# Altium PCB carte_ecureuil2026.PcbDoc
Units mm, origin at the board's own origin, x right, y up, seen from the top; angles counter-clockwise.
Board outline 83 x 54 mm, 2 copper layers (Top Layer, Bottom Layer); 41 components, 34 nets, 131 pads, 0 vias.
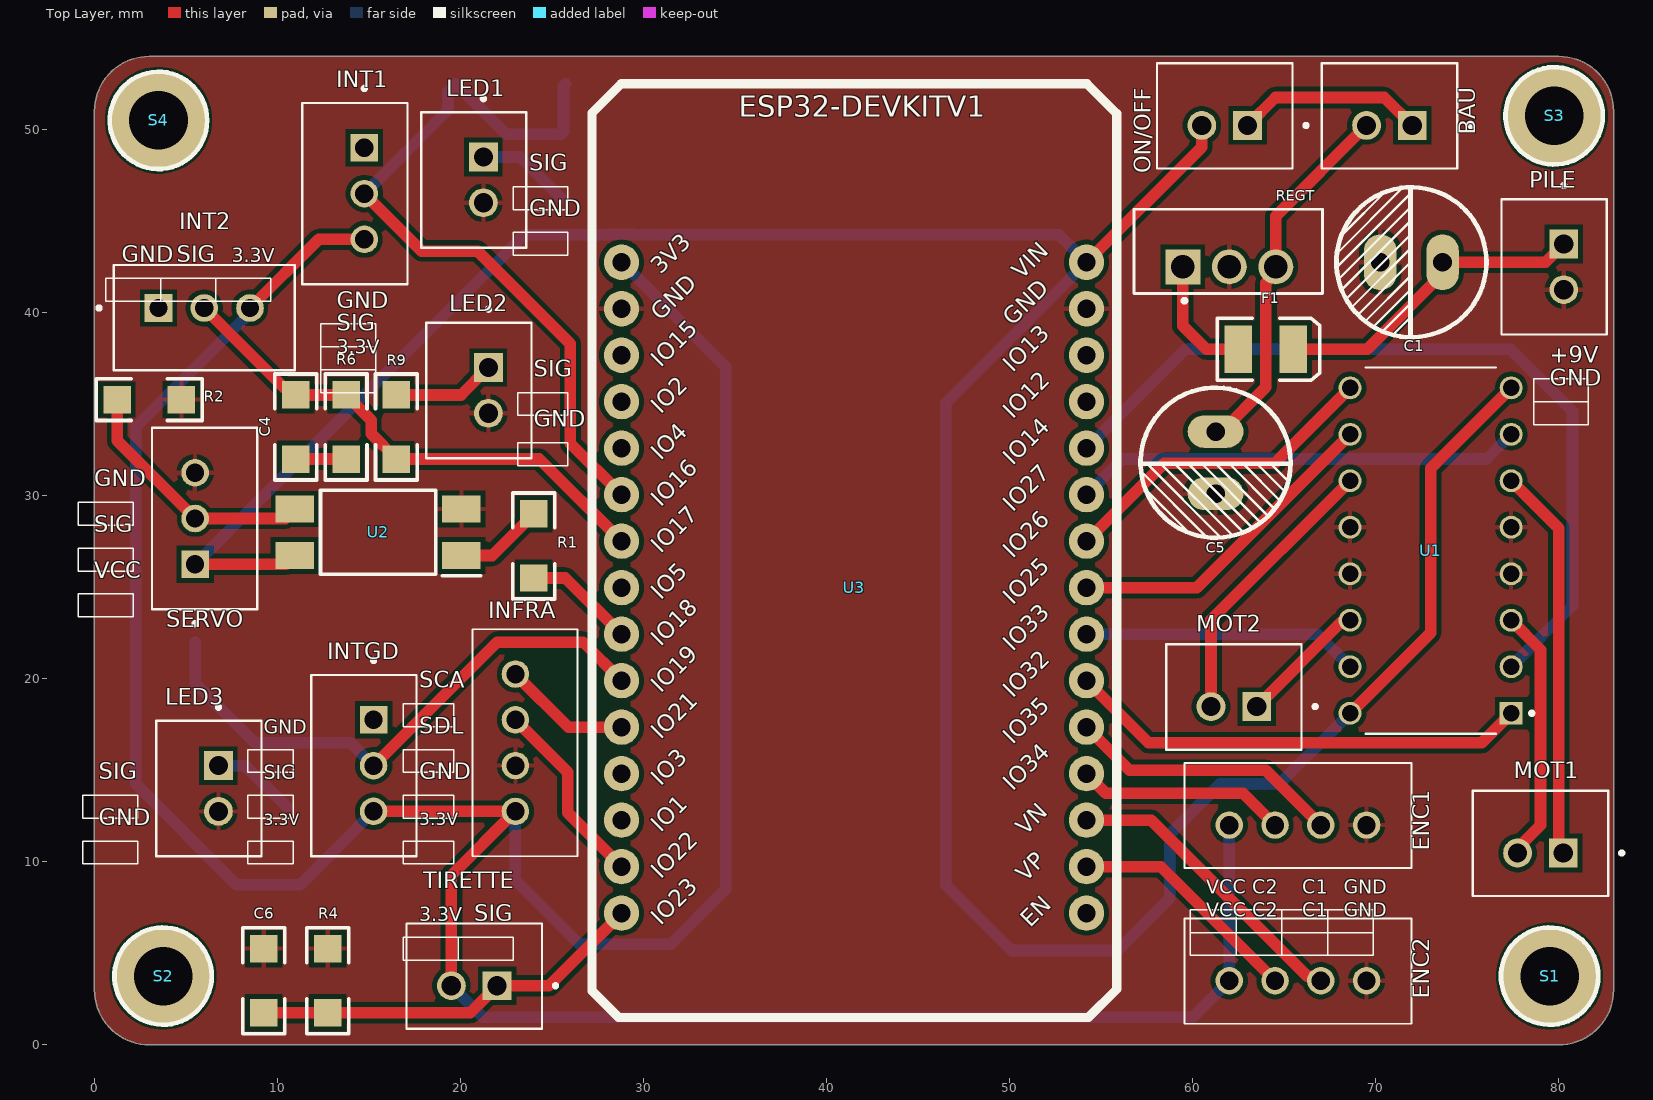
[diagram p0: Top Layer view]
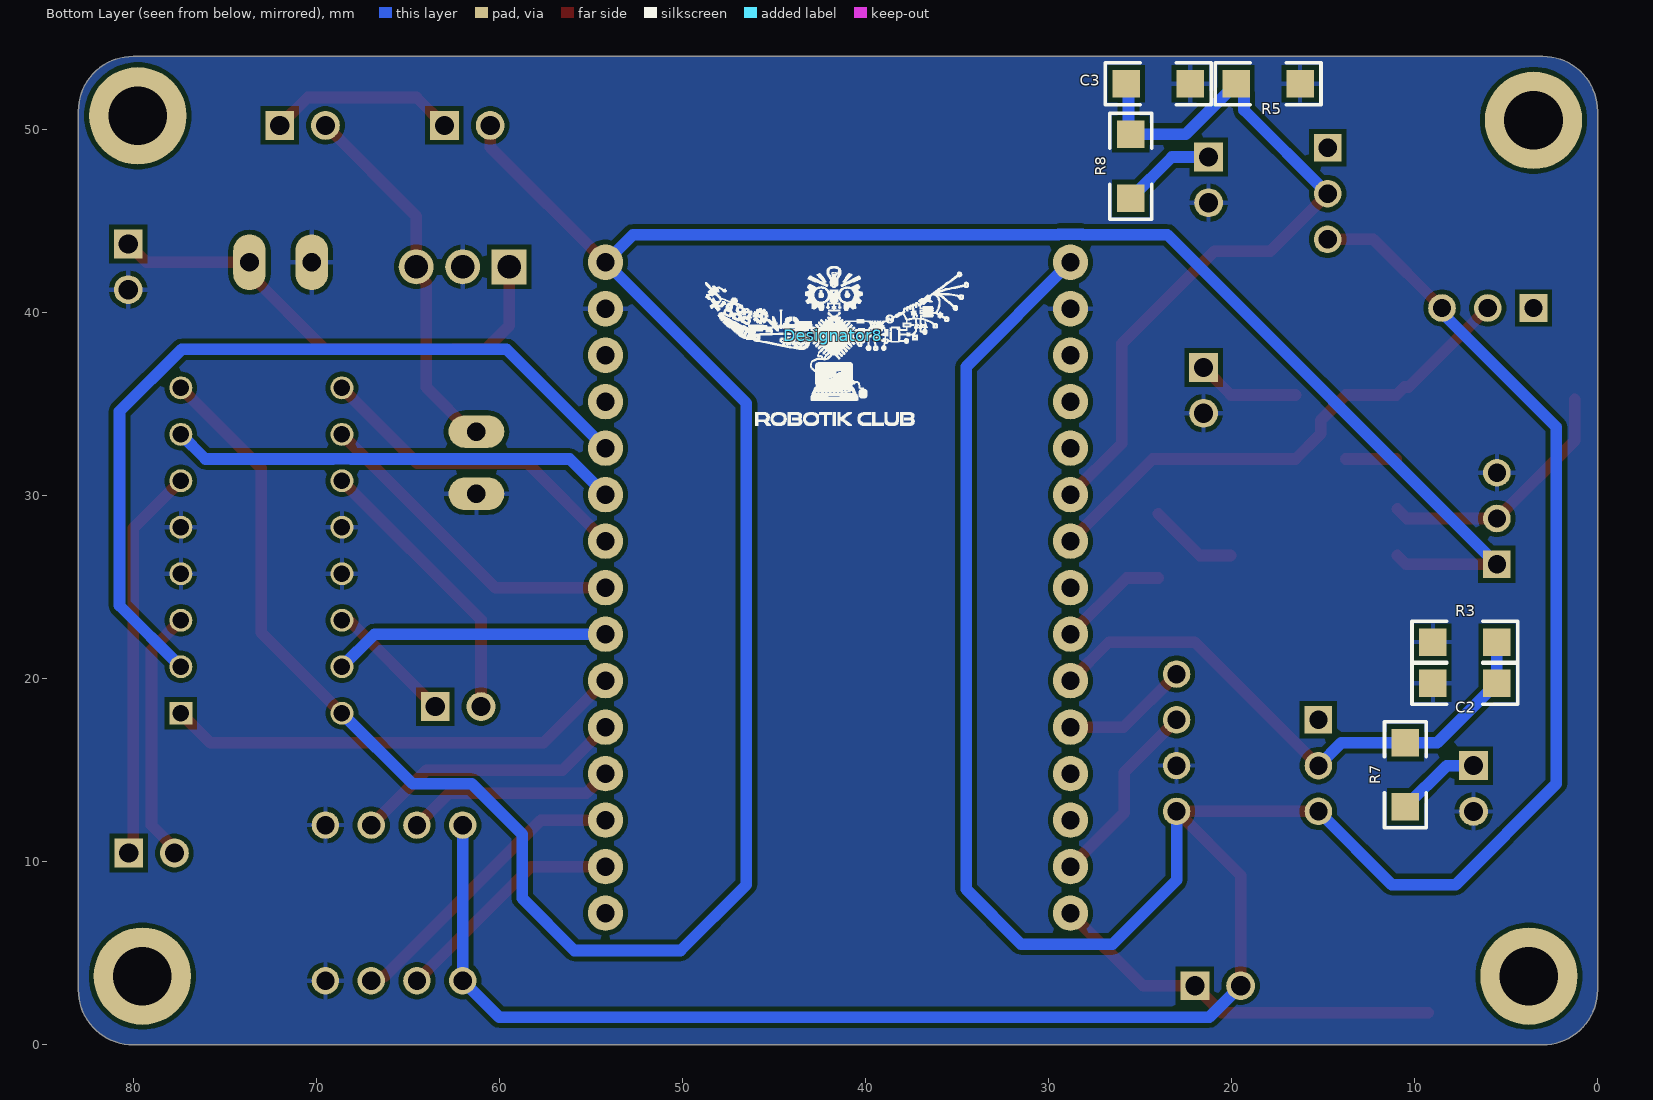
[diagram p1: Bottom Layer view, seen from below]
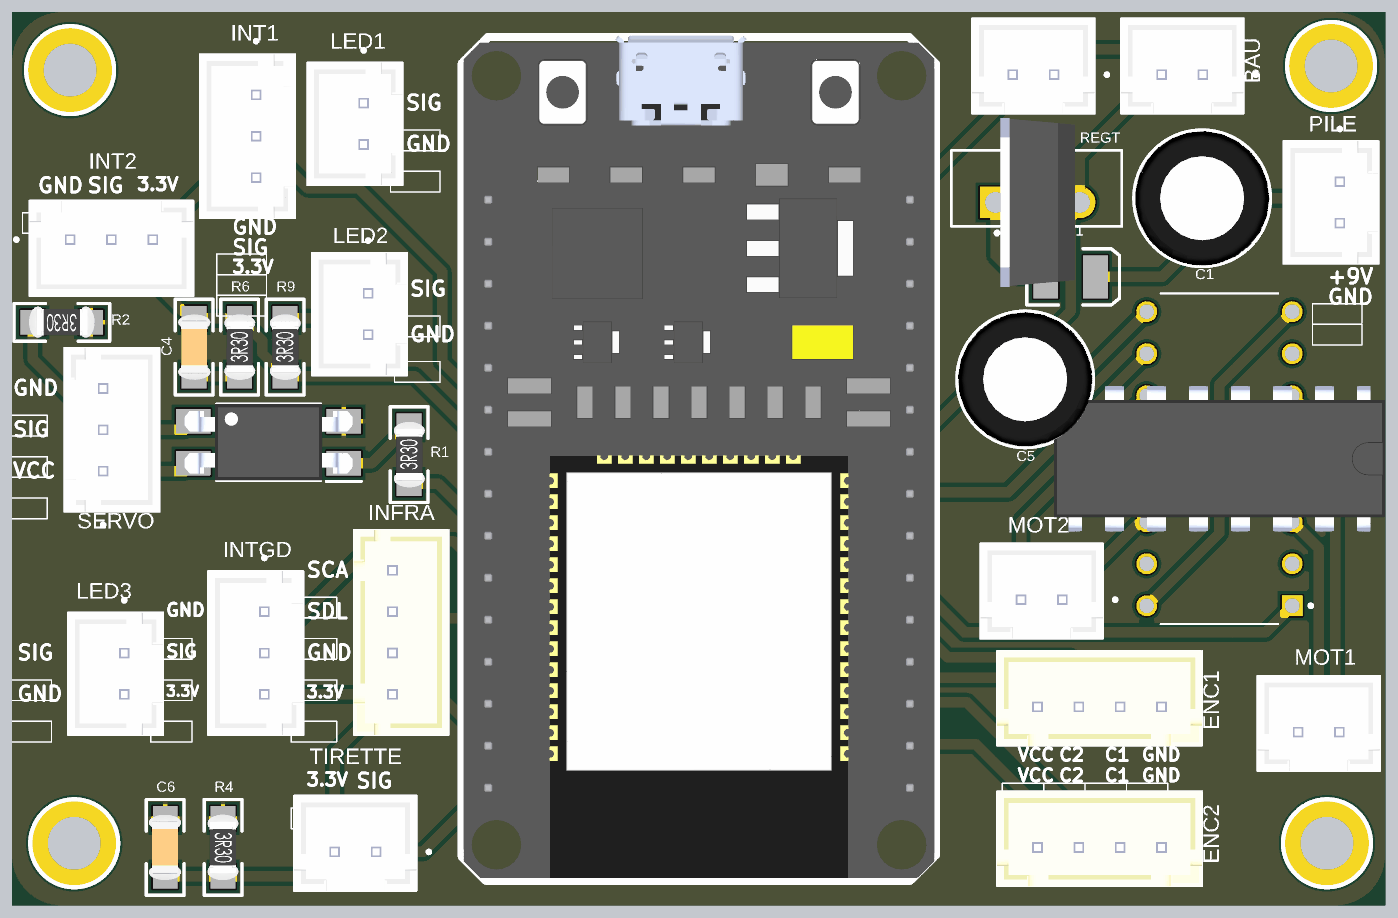
[diagram p2: 3D render of the assembled board from above, using the file's embedded part models]
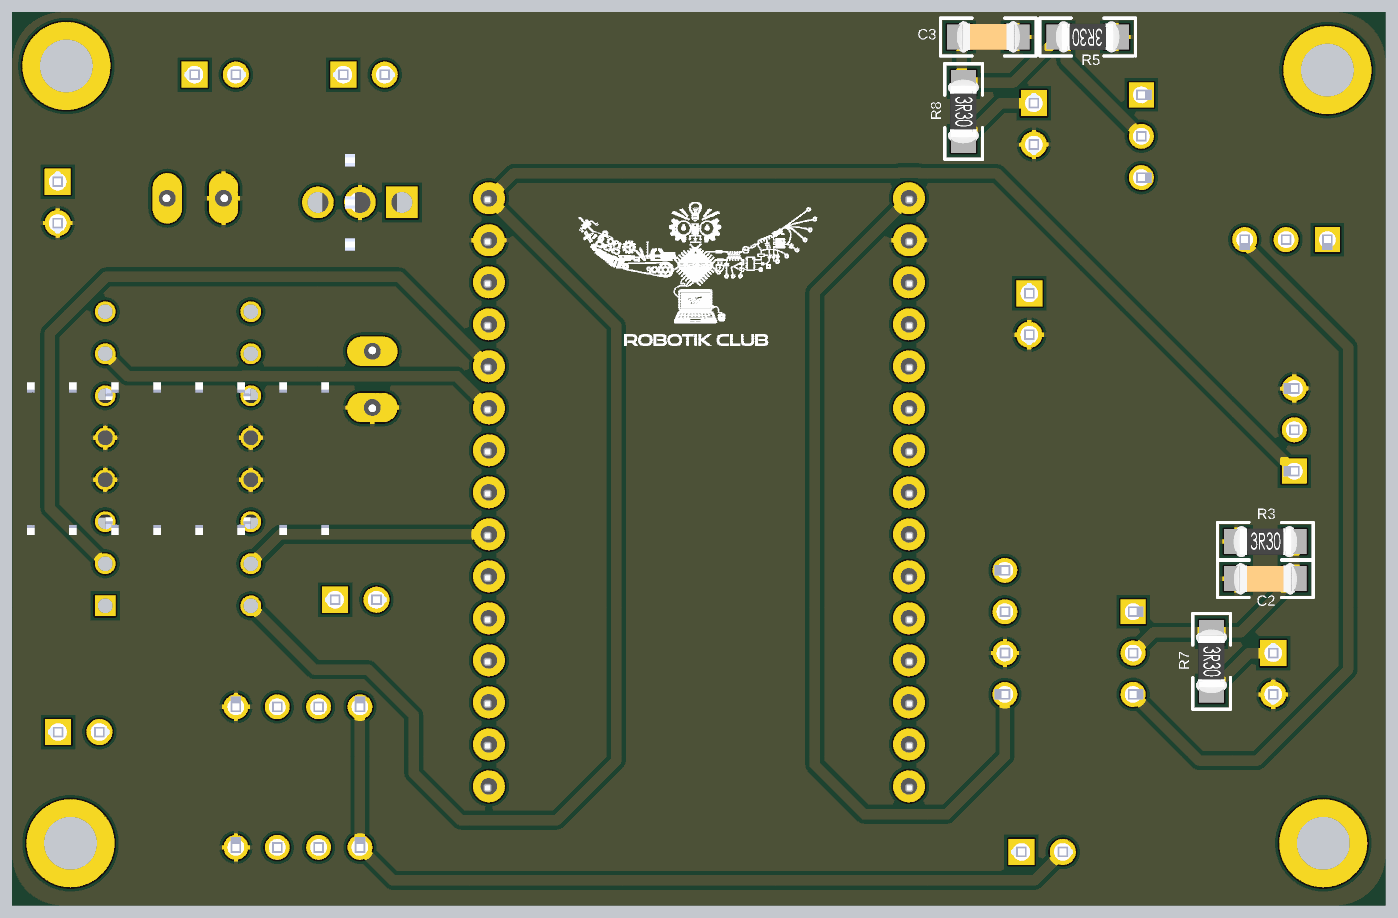
[diagram p3: 3D render of the assembled board from below, using the file's embedded part models]

## Layer stack, top to bottom
Top Solder: solder mask 0.0102, Solder Resist, Dk 3.5
Top Layer: signal copper 0.0356
Dielectric 1: dielectric 0.32, FR-4, Dk 4.8
Bottom Layer: signal copper 0.0356
Bottom Solder: solder mask 0.0102, Solder Resist, Dk 3.5

## Board outline
3,0 80,0 ccw(c80,3) 83,3 83,51 ccw(c80,51) 80,54 3,54 ccw(c3,51) 0,51 0,3 ccw(c3,3)

## Design rules (kind name [scope] priority, off if disabled: settings)
Clearance [All] p1: gap=0.254 ignorepadtopadclearanceinfootprint=FALSE
PolygonConnect [All] p1: connectstyle=Relief reliefconductorwidth=0.254 reliefentries=4 polygonreliefangle="90 Angle" airgapwidth=0.254
RoutingVias [All] p1: holewidth=0.711 width=1.27 viastyle="Through Hole" minholewidth=0.711 minwidth=1.27 maxholewidth=0.711 maxwidth=1.27
SolderMaskExpansion [All] p1: expansion=0.102 istentingtop=FALSE
SupplyNets "Schematic Supply Nets_2" [InNet('GND')] p1: voltage=0.000
SupplyNets "Schematic Supply Nets_1" [InNet('VCC')] p2: voltage=0.000
SupplyNets "Schematic Supply Nets" [InNet('3.3V')] p3: voltage=0.000
Width [All] p1: maxlimit=1.27 minlimit=0.254 preferedwidth=0.254 minimp=50.000000 maximp=50.000000 favimp=50.000000
30 further rules are at their usual default settings.

## Components (designator, comment, footprint, x,y, rotation, side; value= is the part's Value field where it differs from the comment)
BAU "Header 2H" JST_B2B-XH-A_(LF)(SN) 70.75,50.75 r0 top
C1 "35V" Condensateur 73.65,42.75 r180 top value=100uF
C2 "Cap" "Capacitor 1206" 7.25,19.75 r180 bottom value=1µF
C3 "Cap" "Capacitor 1206" 24,52.5 r0 bottom value=1µF
C4 "Cap" "Capacitor 1206" 11,33.75 r90 top value=1µF
C5 "35V" Condensateur 61.25,33.5 r270 top value=100nF
C6 "Cap" "Capacitor 1206" 9.25,3.5 r270 top value=1µF
Designator8 "Comment" Logo_lowres 41.75,38.75 r180 bottom
ENC1 "Header 4" B4BXHALFSN 62,12 r0 top
ENC2 "Header 4" B4BXHALFSN 62,3.5 r0 top
F1 "2A" 3.5X2.8X1.9 64,38 r0 top
INFRA "Header 4" B4BXHALFSN 23,20.25 r270 top
INT1 "Header 3" JST_B3B-XH-A(LF)(SN) 14.225,46.5 r90 top
INT2 "Header 3" JST_B3B-XH-A(LF)(SN) 6,39.725 r180 top
INTGD "Header 3" JST_B3B-XH-A(LF)(SN) 14.725,15.25 r90 top
LED1 "Header 2H" JST_B2B-XH-A_(LF)(SN) 20.725,47.25 r90 top
LED2 "Header 2H" JST_B2B-XH-A_(LF)(SN) 21,35.75 r90 top
LED3 "Header 2H" JST_B2B-XH-A_(LF)(SN) 6.25,14 r90 top
MOT1 "Header 2H" JST_B2B-XH-A_(LF)(SN) 79,11 r0 top
MOT2 "Header 2H" JST_B2B-XH-A_(LF)(SN) 62.25,19 r0 top
ON/OFF "Header 2H" JST_B2B-XH-A_(LF)(SN) 61.75,50.75 r0 top
PILE "Header 2H" JST_B2B-XH-A_(LF)(SN) 79.75,42.5 r90 top
R1 "Res2" "Resistor 1206" 24,27.25 r90 top value=150
R2 "Res2" "Resistor 1206" 3,35.25 r180 top value=10K
R3 "Res2" "Resistor 1206" 7.25,22 r180 bottom value=10K
R4 "Res2" "Resistor 1206" 12.75,3.5 r270 top value=10K
R5 "Res2" "Resistor 1206" 18,52.5 r0 bottom value=10K
R6 "Res2" "Resistor 1206" 13.75,33.75 r90 top value=10K
R7 "Res2" "Resistor 1206" 10.5,14.75 r270 bottom value=330
R8 "Res2" "Resistor 1206" 25.5,48 r270 bottom value=330
R9 "Res2" "Resistor 1206" 16.5,33.75 r90 top value=330
REGT "L7805ACV" TO254P460X1020X1945-3P 62,42.5 r90 top
S1 "Screw M3" "Screw M3" 79.5,3.75 r0 top
S2 "Screw M3" "Screw M3" 3.75,3.75 r0 top
S3 "Screw M3" "Screw M3" 79.75,50.75 r0 top
S4 "Screw M3" "Screw M3" 3.5,50.5 r0 top
SERVO "Header 3" JST_B3B-XH-A(LF)(SN) 6.025,28.75 r270 top
TIRETTE "Header 2H" JST_B2B-XH-A_(LF)(SN) 20.75,3.75 r0 top (schematic designator tirette)
U1 "L293D" DIP880W50P254L2000H510Q16 73,27 r180 top
U2 "FOD817S" SOP254P1016X385-4N 15.5,28 r180 top
U3 "ESP32-DEVKITC-32D" MODULE_ESP32-DEVKITV1 41.5,27.75 r0 top

## Footprints (in the part's own frame and the unit in brackets; to place one, negate y for a bottom-side part, rotate by r counter-clockwise, add the part's x,y. Pads: shape width x height; smd on the part's side, far side on the other; paste and mask are expansions set on the pad)
3.5X2.8X1.9 [mm] "SM LED; 2 C-Bend Leads; Body 3.5 x 2.8 x 1.9 mm, inc leads (LxWxH typ)"
  rect 1.5x2.6 smd: 1(-1.5,0) 2(1.5,0)
  silkscreen extent -2.65,-1.7 2.95,1.7
B4BXHALFSN [mm]
  round 1.5 hole 1: 1(0,0) 2(2.5,0) 3(5,0) 4(7.5,0)
  silkscreen extent -2.45,-2.35 9.95,3.4, body extent -2.45,-2.35 9.95,3.4, height 7.52
"Capacitor 1206" [mm]
  rect 1.5x1.5 smd: 1(-1.75,0) 2(1.75,0)
  silkscreen extent -2.89,-1.14 2.89,1.14, body extent -1.97,-0.99 1.97,0.96, height 1.3
Condensateur [mil]
  oval 70x120 hole 40: 1(0,0) 2(133.86,0)
  silkscreen extent -94,-161 228,161, body extent -93,-160 227,160, height 500
DIP880W50P254L2000H510Q16 [mm]
  rect 1.25x1.25 / inner round 1.25 / far side rect 1.25x1.25 hole 0.9: 1(-4.4,8.89)
  round 1.25 hole 0.9: 2(-4.4,6.35) 3(-4.4,3.81) 4(-4.4,1.27) 5(-4.4,-1.27) 6(-4.4,-3.81) 7(-4.4,-6.35) 8(-4.4,-8.89) 9(4.4,-8.89) 10(4.4,-6.35) 11(4.4,-3.81) 12(4.4,-1.27) 13(4.4,1.27) 14(4.4,3.81) 15(4.4,6.35) 16(4.4,8.89)
  silkscreen extent -5.63,-10 3.55,10, body extent -10,-4.62 10,4.62, height 5.1
JST_B2B-XH-A_(LF)(SN) [mm]
  rect 1.575x1.575 / inner round 1.575 / far side rect 1.575x1.575 hole 1.05: 1(1.25,-0.525)
  round 1.575 hole 1.05: 2(-1.25,-0.525)
  silkscreen extent -3.7,-2.88 4.54,2.88, body extent -3.7,-2.88 3.7,2.88, height 7
JST_B3B-XH-A(LF)(SN) [mm]
  rect 1.508x1.508 / inner round 1.508 / far side rect 1.508x1.508 hole 1: 1(2.5,-0.525)
  round 1.508 hole 1: 2(0,-0.525) 3(-2.5,-0.525)
  silkscreen extent -4.95,-2.88 5.85,2.88, body extent -4.95,-2.88 4.95,2.88, height 7
Logo_lowres [mm]
  silkscreen extent -7.01,-4.93 7.39,3.76
MODULE_ESP32-DEVKITV1 [mm]
  round 1.93 / inner round 1.524 / far side round 1.93 hole 1: 1(-12.7,15) 2(-12.7,12.46) 3(-12.7,9.92) 4(-12.7,7.38) 5(-12.7,4.84) 6(-12.7,2.3) 7(-12.7,-0.24) 8(-12.7,-2.78) 9(-12.7,-5.32) 10(-12.7,-7.86) 11(-12.7,-10.4) 12(-12.7,-12.94) 13(-12.7,-15.48) 14(-12.7,-18.02) 15(-12.7,-20.56) 16(12.7,-20.56) 17(12.7,-18.02) 18(12.7,-15.48) 19(12.7,-12.94) 20(12.7,-10.4) 21(12.7,-7.86) 22(12.7,-5.32) 23(12.7,-2.78) 24(12.7,-0.24) 25(12.7,2.3) 26(12.7,4.84) 27(12.7,7.38) 28(12.7,9.92) 29(12.7,12.46) 30(12.7,15)
  silkscreen extent -14.31,-26.26 14.35,24.75, body extent -14.22,-26.09 14.28,24.84, height 7.2
"Resistor 1206" [mm]
  rect 1.5x1.5 smd: 1(-1.75,0) 2(1.75,0)
  silkscreen extent -2.89,-1.14 2.89,1.14, body extent -1.98,-0.95 1.98,0.93, height 0.55
"Screw M3" [mm] "M3 iso Screw"
  round 5.32 hole 3.2 unplated: 0(0,0)
  silkscreen extent -2.66,-2.66 2.66,2.66
SOP254P1016X385-4N [mm]
  rect 2.1x1.5 smd: 1(-4.55,1.27) 2(-4.55,-1.27) 3(4.55,-1.27) 4(4.55,1.27)
  silkscreen extent -5.6,-2.3 3.15,2.37, body extent -5.08,-2.3 5.08,2.3, height 3.85
TO254P460X1020X1945-3P [mm]
  rect 1.91x1.91 / inner round 1.91 / far side rect 1.91x1.91 hole 1.27: 1(0,2.54)
  round 1.91 hole 1.27: 2(0,0) 3(0,-2.54)
  silkscreen extent -1.96,-5.1 3.15,5.21, body extent -5.1,-2.25 5.1,2.25, height 19.68

## Part data
BAU LED1 LED2 LED3 MOT1 MOT2 ON/OFF PILE TIRETTE: "Header, 2-Pin, Right Angle", LatestRevisionDate=17-Jul-2002, LatestRevisionNote="Re-released for DXP Platform.", Publisher="Altium Limited"
C1 C5: library part "Cap Pol1", "Polarized Capacitor (Radial)", LatestRevisionDate=17-Jul-2002, LatestRevisionNote="Re-released for DXP Platform.", PackageDescription="Polarized Capacitor (Radial); 2 Leads", PackageReference=RB7.6-15, Published=8-Jun-2000, Publisher="Altium Limited"
C2 C3 C4 C6: "Capacitor", LatestRevisionDate=17-Jul-2002, LatestRevisionNote="Re-released for DXP Platform.", PackageDescription="Radial Cap, Thru-Hole; 2 Leads; 0.3 in Pin Spacing", PackageReference=RAD-0.3, Published=8-Jun-2000, Publisher="Altium Limited"
ENC1 ENC2 INFRA: "Header, 4-Pin", LatestRevisionDate=17-Jul-2002, LatestRevisionNote="Re-released for DXP Platform.", Publisher="Altium Limited"
F1: library part "Fuse 2", "Resettable Fuse αA / JF", LatestRevisionDate=17-Jul-2002, LatestRevisionNote="Re-released for DXP Platform.", PackageDescription="Thru-Hole; 2 Leads", PackageReference=PIN-W2/E2.8, Published=8-Jun-2000, Publisher="Altium Limited"
INT1 INT2 INTGD SERVO: "Header, 3-Pin", LatestRevisionDate=17-Jul-2002, LatestRevisionNote="Re-released for DXP Platform.", Publisher="Altium Limited"
R1 R2 R3 R4 R5 R6 R7 R8 R9: "Resistor", LatestRevisionDate=17-Jul-2002, LatestRevisionNote="Re-released for DXP Platform.", PackageDescription="Axial Device, Thru-Hole; 2 Leads; 0.4 in Pin Spacing", PackageReference=AXIAL-0.4, Published=8-Jun-2000, Publisher="Altium Limited"
REGT: "Linear Voltage Regulator IC Positive Fixed 1 Output 1.5A TO-220", Package="TO-220-3 STMicroelectronics", Check_prices=https://www.snapeda.com/parts/L7805ACV/STMicroelectronics/view-part/?ref=eda, MF=STMicroelectronics, MP=L7805ACV, SnapEDA_Link=https://www.snapeda.com/parts/L7805ACV/STMicroelectronics/view-part/?ref=snap
U1: "Bipolar Motor Driver - Parallel 16-PowerDIP", Package="DIP-16 STMicroelectronics", Availability="In Stock", Check_prices=https://www.snapeda.com/parts/L293D/STMicroelectronics/view-part/?ref=eda, MF=STMicroelectronics, MP=L293D, Price=None, Purchase-URL=https://pricing.snapeda.com/search/part/L293D/?ref=eda, SnapEDA_Link=https://www.snapeda.com/parts/L293D/STMicroelectronics/view-part/?ref=snap
U2: library part Optoisolator1, "4-Pin Phototransistor Optocoupler", DatasheetVersion=Nov-2003, LatestRevisionDate=04-Mar-2005, LatestRevisionNote="Sch pins 3 & 4 Swapped.", PackageReference=DIP-4, Published=24-Mar-1999, Publisher="Altium Limited"
U3: "Eval Board For Esp-Wroom-32", Package=None, Availability=Unavailable, MF="Espressif Systems", MP=ESP32-DEVKITC-32D, Price=None, SnapEDA_Link=https://www.snapeda.com/parts/ESP32-DEVKITC-32D/Espressif%20Systems/view-part/?ref=snap

## Nets (pads, with @x,y where several pads share a name; then routed paths per layer and width w, separated by ;. In a path a pad name is that pad's centre, name@x,y a point inside that pad or via, vN(x,y) a via of type N, cw(c..) or ccw(c..) an arc to the next point about the centre after c; other vN are vias at no path point)
3.3V: ENC1.1 ENC2.1 INFRA.4 INT1.3 INT2.3 INTGD.3 TIRETTE.2 U3.1 | length 179.1
  Top Layer w0.635: INT2.3 12.25,44 INT1.3 ; INTGD.3 INFRA.4 19.5,9.25 TIRETTE.2
  Bottom Layer w0.635: INT2.3 8.5,40 2.25,33.75 2.25,14.25 7.75,8.75 11.25,8.75 INTGD.3 ; TIRETTE.2 21.225,1.5 60,1.5 ENC2.1 ENC1.1 ; INFRA.4 23,9 26.5,5.5 31.5,5.5 34.5,8.5 34.5,37.05 U3.1
C11: ENC1.3 U3.20 | length 15
  Top Layer w0.635: U3.20 56.55,15 64,15 ENC1.3
C12: ENC1.2 U3.19 | length 11.5
  Top Layer w0.635: U3.19 55.26,13.75 62.75,13.75 ENC1.2
C21: ENC2.3 U3.18 | length 16.4
  Top Layer w0.635: U3.18 57.73,12.27 66.262,3.738 66.762,3.738 ENC2.3
C22: ENC2.2 U3.17 | length 12.9
  Top Layer w0.635: U3.17 58.27,9.73 ENC2.2
"enable 1": U1.1 U3.21 | length 25.3
  Top Layer w0.635: U3.21 57.59,16.5 75.79,16.5 U1.1
"enable 2": U1.9 U3.24 | length 17.9
  Top Layer w0.635: U3.24 58.455,31.765 64.475,31.765 U1.9
ESP_PWM: R1.1 U3.9 | length 6.1
  Top Layer w0.635: R1.1 25.73,25.5 U3.9
GND: C1.2 C2.1 C3.1 C5.2 C6.1 ENC1.4 ENC2.4 INFRA.3 LED1.2 LED2.2 LED3.2 PILE.2 R2.1 R3.1 R4.1 R5.1 REGT.2 SERVO.3 U1.4 U1.5 U1.12 U1.13 U2.2 U3.2 U3.29
I2C_SCL: INFRA.2 U3.14 | length 10.4
  Top Layer w0.635: INFRA.2 25.859,14.891 25.859,12.671 U3.14
I2C_SDA: INFRA.1 U3.11 | length 7
  Top Layer w0.635: INFRA.1 25.9,17.35 U3.11
M1: MOT1.2 U1.3 | length 13.9
  Top Layer w0.635: U1.3 79,21.59 79,12 77.75,10.75 MOT1.2
M2: MOT1.1 U1.6 | length 21.5
  Top Layer w0.635: U1.6 80,28.21 80,10.725 MOT1.1
M3: MOT2.2 U1.11 | length 15.5
  Top Layer w0.635: MOT2.2 61,23.21 U1.11
M4: MOT2.1 U1.14 | length 7.1
  Top Layer w0.635: MOT2.1 68.097,23.072 68.482,23.072 U1.14
NetBAU_1: BAU.1 ON/OFF.1 | length 10.3
  Top Layer w0.635: ON/OFF.1 64.525,51.75 70.475,51.75 BAU.1
NetBAU_2: BAU.2 C5.1 REGT.3 | length 20.3
  Top Layer w0.635: C5.1 61.576,33.5 64,35.924 64,41.615 64.54,42.155 64.54,45.265 BAU.2
NetC1_1: C1.1 F1.2 PILE.1 | length 17.5
  Top Layer w0.635: F1.2 69.535,38 73.65,42.115 C1.1 79.275,42.75 PILE.1
NetC4_1: C4.1 R6.1 | length 2.8
  Top Layer w0.635: C4.1 R6.1
NetF1_1: F1.1 REGT.1 | length 6.8
  Top Layer w0.635: REGT.1 59.46,39.29 60.75,38 F1.1
NetLED1_1: LED1.1 R8.2 | length 5.2
  Bottom Layer w0.635: LED1.1 23.25,48.5 R8.2
NetLED2_1: LED2.1 R9.2 | length 5.6
  Top Layer w0.635: R9.2 20.025,35.5 LED2.1
NetLED3_1: LED3.1 R7.2 | length 4.7
  Bottom Layer w0.635: LED3.1 8.25,15.25 R7.2
NetR1_2: R1.2 U2.1 | length 4.9
  Top Layer w0.635: U2.1 21.73,26.73 R1.2
OPT_PWM: R2.2 SERVO.2 U2.3 | length 13.9
  Top Layer w0.635: R2.2 1.25,33 SERVO.2 10.43,28.75 U2.3
"Sens1 M1": U1.2 U3.26 | length 45.5
  Bottom Layer w0.635: U3.26 59.61,38 77.351,38 80.75,34.601 80.75,24 U1.2
"Sens1 M2": U1.10 U3.23 | length 17.9
  Top Layer w0.635: U3.23 60.22,24.97 U1.10
"Sens2 M1": U1.7 U3.25 | length 24.6
  Bottom Layer w0.635: U3.25 56.15,32 68.098,32 68.104,32.006 69.096,32.006 69.102,32 76.05,32 U1.7
"Sens2 M2": U1.15 U3.22 | length 15.1
  Bottom Layer w0.635: U3.22 66.82,22.43 U1.15
switch_gd: C2.2 INTGD.2 R3.2 R7.1 U3.10 | length 31.1
  Top Layer w0.635: INTGD.2 22,22 26.69,22 U3.10
  Bottom Layer w0.635: R3.2 C2.2 8.75,16.5 R7.1 14,16.5 INTGD.2
switch_R1: C3.2 INT1.2 R5.2 R8.1 U3.6 | length 41.9
  Top Layer w0.635: INT1.2 17.892,43.358 20.939,43.358 26,38.297 26,32.85 U3.6
  Bottom Layer w0.635: INT1.2 19.317,51.067 19.317,52.067 R5.2 22.5,49.75 R8.1 25.625,49.875 25.625,52.375 C3.2
switch_R2: C4.2 INT2.2 R6.2 R9.1 U3.7 | length 28.5
  Top Layer w0.635: INT2.2 10.318,35.932 10.567,35.932 C4.2 R6.2 15.125,34.125 15.125,33.375 R9.1 24.31,32 U3.7
tirette: C6.2 R4.2 TIRETTE.1 U3.15 | length 21.8
  Top Layer w0.635: C6.2 R4.2 20.525,1.75 TIRETTE.1 24.835,3.225 U3.15
VCC: ON/OFF.2 SERVO.1 U1.8 U1.16 U2.4 U3.30 | length 162.2
  Top Layer w0.635: SERVO.1 10.47,26.25 U2.4 ; U3.30 60.492,49.042 60.492,50.217 ON/OFF.2 ; U1.16 73,22.51 73,31.49 U1.8
  Bottom Layer w0.635: SERVO.1 23.5,44.25 28.127,44.25 28.163,44.287 29.437,44.287 29.473,44.25 52.7,44.25 U3.30 46.5,35.05 46.5,8.75 50.102,5.148 55.898,5.148 58.75,8 58.75,11.5 61.5,14.25 64.74,14.25 U1.16
pads on no net: INT1.1 INT2.1 INTGD.1 S1.0 S2.0 S3.0 S4.0 U3.3 U3.4 U3.5 U3.8 U3.12 U3.13 U3.16 U3.27 U3.28

## Polygon pours and split planes (outlines as drawn)
GND on Bottom Layer "GND_L02_P001" (solid, remove dead copper, pour order 1): 3,0 80,0 ccw(c80,3) 83,3 83,51 ccw(c80,51) 80,54 3,54 ccw(c3,51) 0,51 0,3 ccw(c3,3)
GND on Top Layer "GND_L01_P000" (solid, remove dead copper, pour order 0): 3,0 80,0 ccw(c80,3) 83,3 83,51 ccw(c80,51) 80,54 3,54 ccw(c3,51) 0,51 0,3 ccw(c3,3)

## Silkscreen, mask and mechanical layers (free items; w line width, h text height)
Top Overlay:
  lines w0.076: 3.621,40.629 0.621,40.629 0.621,41.879 3.621,41.879 ; 3.621,40.629 3.621,41.879 ; 3.621,40.629 6.621,40.629 ; 3.621,40.629 3.621,41.879 ; 3.621,41.879 6.621,41.879 ; 6.621,40.629 9.621,40.629 9.621,41.879 6.621,41.879 ; 6.621,40.629 6.621,41.879 ; 6.621,40.629 6.621,41.879 ; 12.371,36.879 15.371,36.879 ; 12.371,36.879 12.371,35.629 15.371,35.629 15.371,36.879 ; 12.371,36.879 15.371,36.879 ; 12.371,36.879 12.371,38.129 ; 12.371,38.129 15.371,38.129 ; 12.371,38.129 15.371,38.129 ; 12.371,38.129 12.371,39.379 15.371,39.379 15.371,38.129 ; 15.371,36.879 15.371,38.129 ; 19.871,4.629 16.871,4.629 16.871,5.879 19.871,5.879 ; 19.871,4.629 19.871,5.879 ; 19.871,4.629 22.871,4.629 22.871,5.879 19.871,5.879 ; 19.871,4.629 19.871,5.879 ; 59.871,6.129 62.371,6.129 ; 59.871,6.129 59.871,7.379 62.371,7.379 ; 59.871,6.129 62.371,6.129 ; 59.871,6.129 59.871,4.879 62.371,4.879 ; 62.371,4.879 64.871,4.879 ; 62.371,4.879 62.371,6.129 ; 62.371,4.879 62.371,6.129 ; 62.371,6.129 64.871,6.129 ; 62.371,6.129 62.371,7.379 ; 62.371,6.129 64.871,6.129 ; 62.371,6.129 62.371,7.379 ; 62.371,7.379 64.871,7.379 ; 64.871,4.879 64.871,6.129 ; 64.871,4.879 67.371,4.879 ; 64.871,4.879 64.871,6.129 ; 64.871,6.129 67.371,6.129 ; 64.871,6.129 64.871,7.379 ; 64.871,6.129 64.871,7.379 ; 64.871,6.129 67.371,6.129 ; 64.871,7.379 67.371,7.379 ; 67.371,4.879 69.871,4.879 69.871,6.129 ; 67.371,4.879 67.371,6.129 ; 67.371,4.879 67.371,6.129 ; 67.371,6.129 67.371,7.379 ; 67.371,6.129 69.871,6.129 ; 67.371,6.129 67.371,7.379 ; 67.371,6.129 69.871,6.129 ; 67.371,7.379 69.871,7.379 69.871,6.129 ; 78.621,35.129 81.621,35.129 ; 78.621,35.129 78.621,33.879 81.621,33.879 81.621,35.129 ; 78.621,35.129 81.621,35.129 ; 78.621,35.129 78.621,36.379 81.621,36.379 81.621,35.129 ; -0.879,23.379 2.121,23.379 2.121,24.629 -0.879,24.629 -0.879,23.379 ; -0.879,25.879 2.121,25.879 2.121,27.129 -0.879,27.129 -0.879,25.879 ; -0.879,28.379 2.121,28.379 2.121,29.629 -0.879,29.629 -0.879,28.379 ; -0.629,9.879 2.371,9.879 2.371,11.129 -0.629,11.129 -0.629,9.879 ; -0.629,12.379 2.371,12.379 2.371,13.629 -0.629,13.629 -0.629,12.379 ; 8.371,9.879 10.871,9.879 10.871,11.129 8.371,11.129 8.371,9.879 ; 8.371,12.379 10.871,12.379 10.871,13.629 8.371,13.629 8.371,12.379 ; 8.371,14.879 10.871,14.879 10.871,16.129 8.371,16.129 8.371,14.879 ; 16.871,9.879 19.621,9.879 19.621,11.129 16.871,11.129 16.871,9.879 ; 16.871,12.379 19.621,12.379 19.621,13.629 16.871,13.629 16.871,12.379 ; 16.871,14.879 19.621,14.879 19.621,16.129 16.871,16.129 16.871,14.879 ; 16.871,17.379 19.621,17.379 19.621,18.629 16.871,18.629 16.871,17.379 ; 22.871,43.129 25.871,43.129 25.871,44.379 22.871,44.379 22.871,43.129 ; 22.871,45.629 25.871,45.629 25.871,46.879 22.871,46.879 22.871,45.629 ; 23.121,31.629 25.871,31.629 25.871,32.879 23.121,32.879 23.121,31.629 ; 23.121,34.379 25.871,34.379 25.871,35.629 23.121,35.629 23.121,34.379
  text "SIG" at 23.75,47.75 h0.89
  text "GND" at 23.75,45.25 h0.89
  text "GND" at 1.5,42.75 h0.89
  text "SIG" at 4.5,42.75 h0.89
  text "3.3V" at 7.5,42.75 h0.76
  text "GND" at 13.25,40.25 h0.89
  text "SIG" at 13.25,39 h0.89
  text "3.3V" at 13.25,37.75 h0.76
  text "+9V" at 79.5,37.25 h0.89
  text "SIG" at 24,36.5 h0.89
  text "GND" at 79.5,36 h0.89
  text "GND" at 24,33.75 h0.89
  text "GND" at 0,30.5 h0.89
  text "SIG" at 0,28 h0.89
  text "VCC" at 0,25.5 h0.89
  text "SCA" at 17.75,19.5 h0.89
  text "GND" at 9.25,17 h0.76
  text "SDL" at 17.75,17 h0.89
  text "SIG" at 0.25,14.5 h0.89
  text "SIG" at 9.25,14.5 h0.76
  text "GND" at 17.75,14.5 h0.89
  text "GND" at 0.25,12 h0.89
  text "3.3V" at 9.25,12 h0.61
  text "3.3V" at 17.75,12 h0.69
  text "VCC" at 60.75,8.25 h0.76
  text "C2" at 63.25,8.25 h0.76
  text "C1" at 66,8.25 h0.76
  text "GND" at 68.25,8.25 h0.76
  text "VCC" at 60.75,7 h0.76
  text "C2" at 63.25,7 h0.76
  text "C1" at 66,7 h0.76
  text "GND" at 68.25,7 h0.76
  text "3.3V" at 17.75,6.75 h0.76
  text "SIG" at 20.75,6.75 h0.89
Mechanical 1:
  lines w0.254: 83,51 ccw(c80,51) 80,54 2.75,54 ccw(c2.875,51.125) 0,51 0,2.5 ccw(c2.75,2.75) 3,0 79.75,0 ccw(c80,3) 83,2.75 83,51 ; 83,51 83,51

## Text inside footprints (layer, text, board x,y; h text height)
U3: Top Overlay "EN" at 51.35,6.16 h1.57 r45; Top Overlay "VP" at 51.1,8.63 h1.57 r45; Top Overlay "VN" at 51.1,11.17 h1.57 r45; Top Overlay "IO34" at 50.38,13.6 h1.57 r45; Top Overlay "IO35" at 50.38,16.14 h1.57 r45; Top Overlay "IO32" at 50.38,18.68 h1.57 r45; Top Overlay "IO33" at 50.38,21.22 h1.57 r45; Top Overlay "IO25" at 50.38,23.76 h1.57 r45; Top Overlay "IO26" at 50.38,26.3 h1.57 r45; Top Overlay "IO27" at 50.38,28.84 h1.57 r45; Top Overlay "IO14" at 50.38,31.38 h1.57 r45; Top Overlay "IO12" at 50.38,33.92 h1.57 r45; Top Overlay "IO13" at 50.38,36.46 h1.57 r45; Top Overlay "GND" at 50.38,39 h1.57 r45; Top Overlay "VIN" at 50.87,41.55 h1.57 r45; Top Overlay "IO23" at 31.17,6.25 h1.57 r45; Top Overlay "IO22" at 31.17,8.79 h1.57 r45; Top Overlay "IO1" at 31.17,11.33 h1.57 r45; Top Overlay "IO3" at 31.17,13.87 h1.57 r45; Top Overlay "IO21" at 31.17,16.41 h1.57 r45; Top Overlay "IO19" at 31.17,18.95 h1.57 r45; Top Overlay "IO18" at 31.17,21.49 h1.57 r45; Top Overlay "IO5" at 31.17,24.03 h1.57 r45; Top Overlay "IO17" at 31.17,26.57 h1.57 r45; Top Overlay "IO16" at 31.17,29.11 h1.57 r45; Top Overlay "IO4" at 31.17,31.65 h1.57 r45; Top Overlay "IO2" at 31.17,34.19 h1.57 r45; Top Overlay "IO15" at 31.17,36.73 h1.57 r45; Top Overlay "GND" at 31.17,39.27 h1.57 r45; Top Overlay "3V3" at 31.17,41.81 h1.57 r45; Top Overlay "ESP32-DEVKITV1" at 35.21,50.32 h1.97